# Altium PCB PCB1.PcbDoc
Units mm, origin at the board's own origin, x right, y up, seen from the top; angles counter-clockwise.
Board outline 45 x 30.8 mm, 2 copper layers (Top Layer, Bottom Layer), stack 1.57 mm thick; 27 components, 22 nets, 147 pads, 2 vias.
Unrouted connection lines stored in the file: 2.
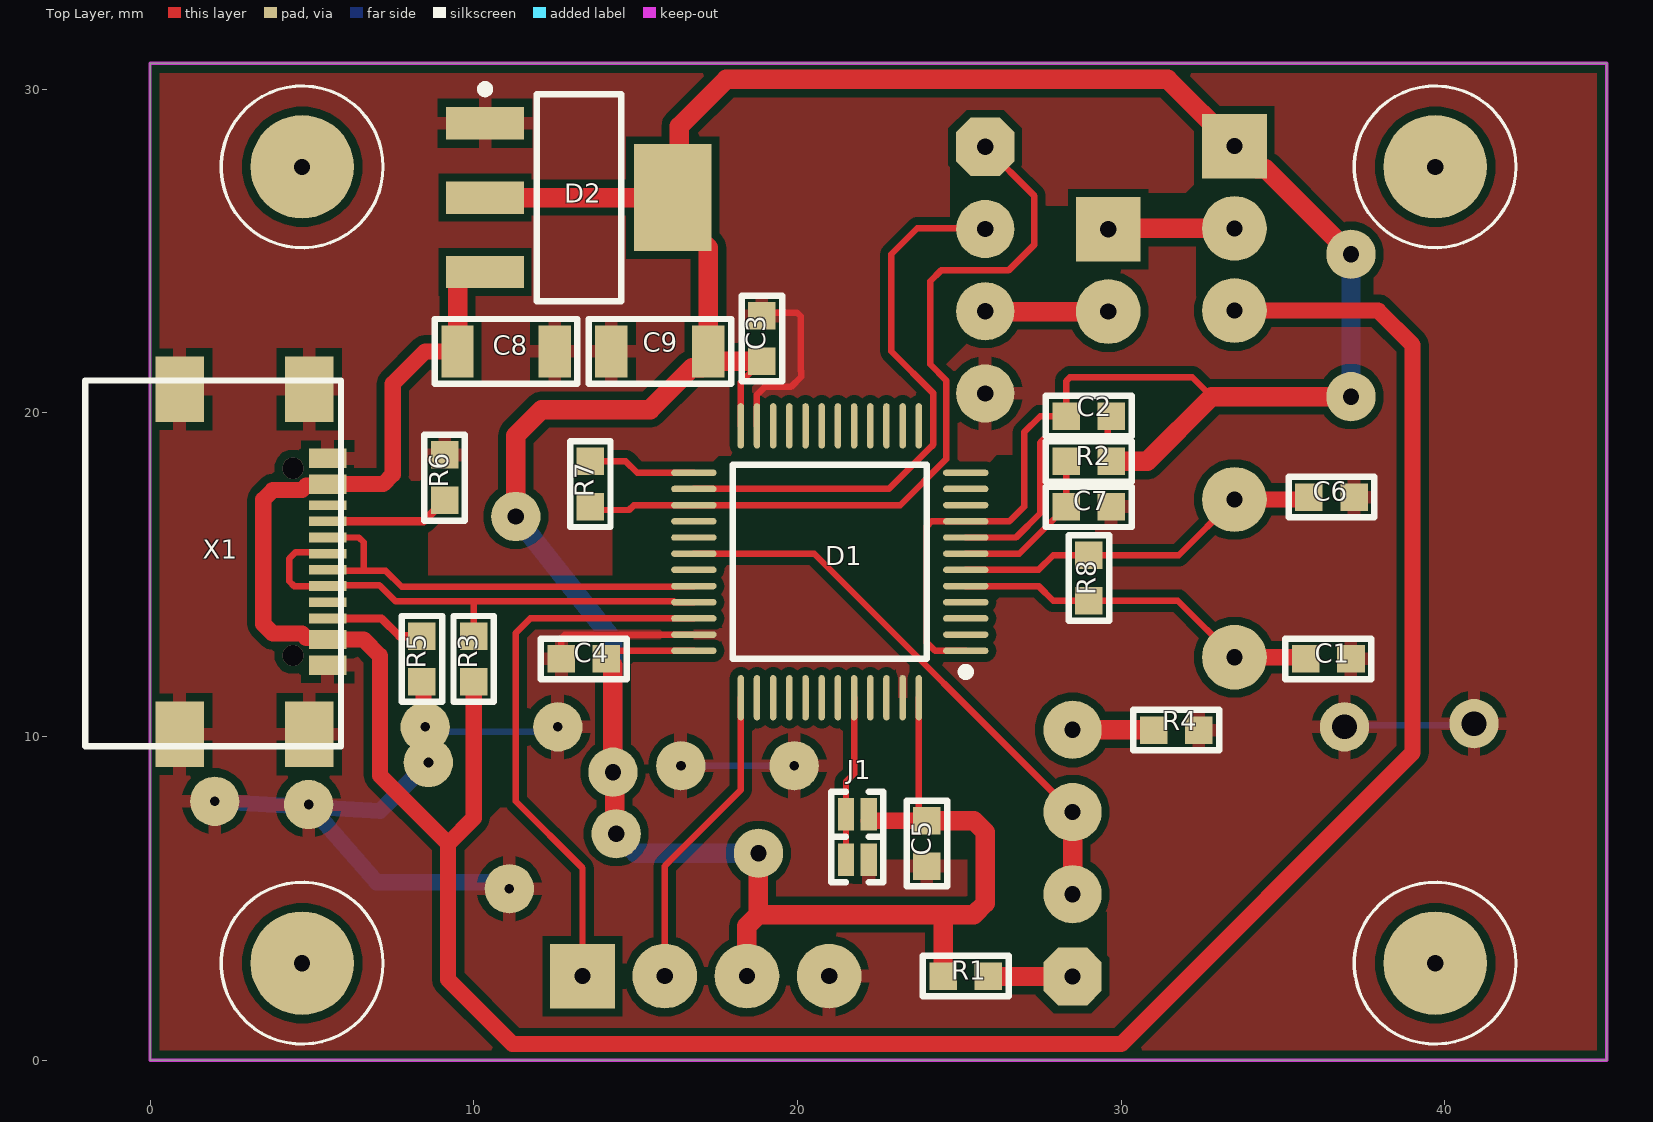
[diagram p0: Top Layer view]
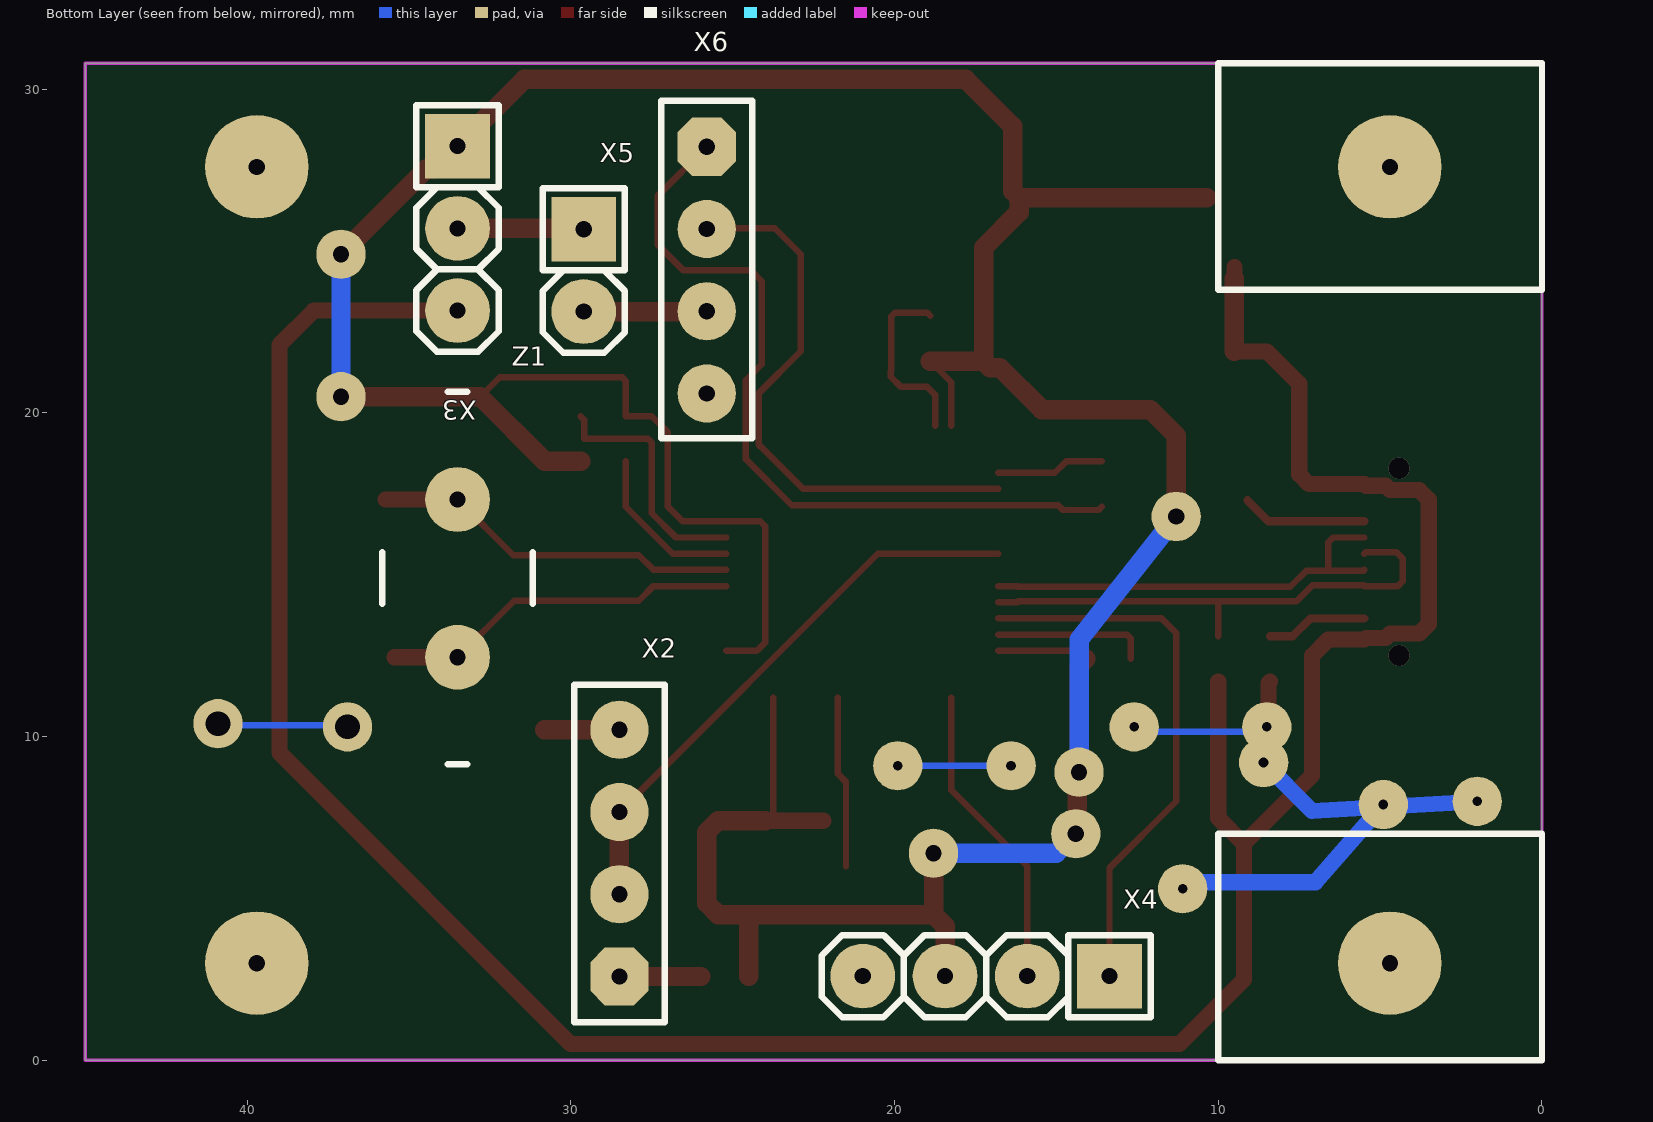
[diagram p1: Bottom Layer view, seen from below]
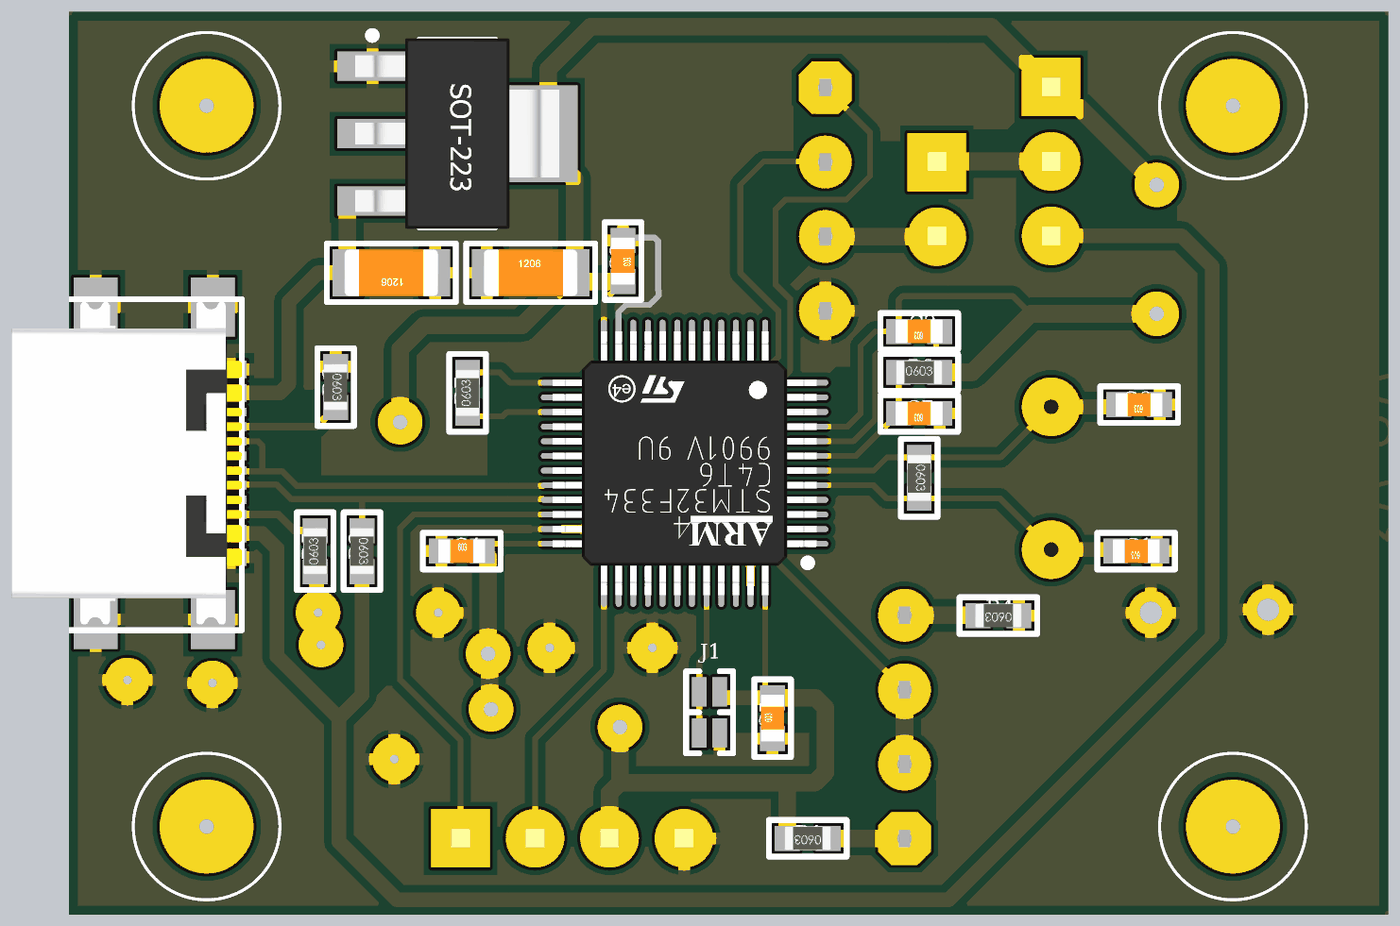
[diagram p2: 3D render of the assembled board from above, using the file's embedded part models]
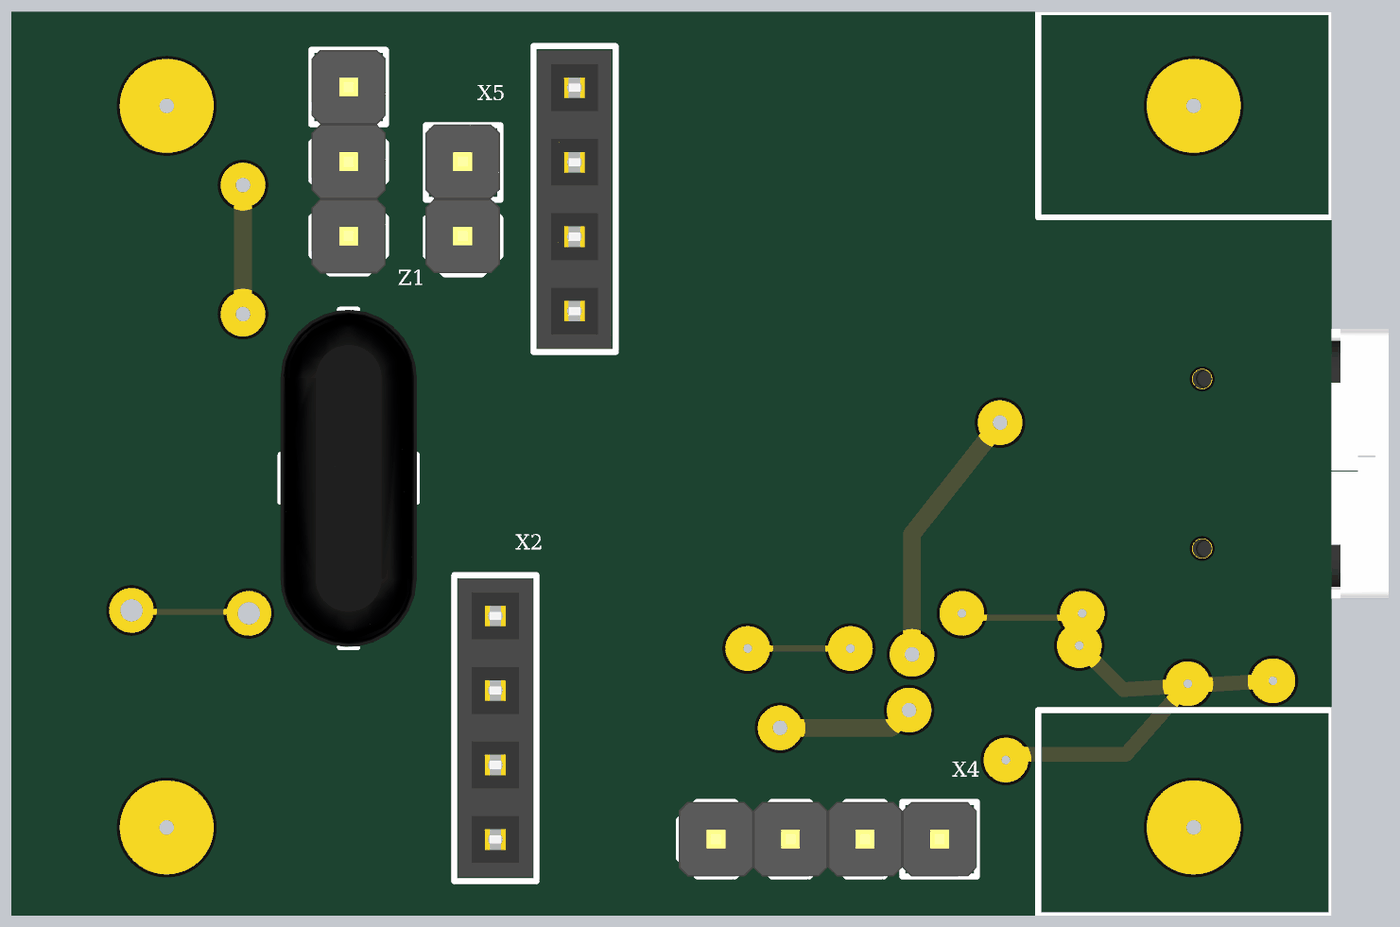
[diagram p3: 3D render of the assembled board from below, using the file's embedded part models]

## Layer stack, top to bottom
Top Solder: solder mask 0.0102, Solder Resist, Dk 3.5
Top Layer: signal copper 0.0356
Dielectric 1: core 1.4986, Core-043, Dk 4.3
Bottom Layer: signal copper 0.0356
Bottom Solder: solder mask 0.0102, Solder Resist, Dk 3.5

## Board outline
0,0 45,0 45,30.8 0,30.8

## Design rules (kind name [scope] priority, off if disabled: settings)
Clearance [All] p1: gap=0.1 ignorepadtopadclearanceinfootprint=FALSE except(0.25: Arc-Poly Track-Poly SMDPad-Poly THPad-Poly Via-Poly Fill-Poly Poly-Poly)
DiffPairsRouting [All] p1: maxlimit=0.25 minlimit=0.25 mostfreqgap=0.25 toplayer_minwidth=0.2 toplayer_maxwidth=0.2 toplayer_prefwidth=0.2 bottomlayer_minwidth=0.2 bottomlayer_maxwidth=0.2 bottomlayer_prefwidth=0.2 maxuncoupledlength=12.7
PolygonConnect [All] p1: connectstyle=Relief reliefconductorwidth=0.4 reliefentries=4 polygonreliefangle="90 Angle" airgapwidth=0.254
RoutingVias [All] p1: holewidth=0.711 width=1.27 viastyle="Through Hole" minholewidth=0.711 minwidth=1.27 maxholewidth=0.711 maxwidth=1.27
SolderMaskExpansion [All] p1: expansion=0.102 istentingtop=FALSE
SupplyNets "Schematic Supply Nets_2" [InNet('GND')] p1: voltage=0.000
SupplyNets "Schematic Supply Nets_1" [InNet('+3.3')] p2: voltage=0.000
SupplyNets "Schematic Supply Nets" [InNet('+5')] p3: voltage=0.000
Width [All] p1: maxlimit=10 minlimit=0.1 preferedwidth=0.254
29 further rules are at their usual default settings.

## Classes and differential pairs
differential pair USB: +USB_P -USB_N
differential pair CLOCK: +CLOCK_P -CLOCK_N

## Components (designator, comment, footprint, x,y, rotation, side; value= is the part's Value field where it differs from the comment)
C1 "Ceramic capacitor, 18pF, X7R, ±10%, 16V, 0603, -55...+125°C" "CAP: 0603" 36.4,12.4 r180 top value=18pF
C2 "Ceramic capacitor, 0.1μF, X7R, ±10%, 16V, 0603, -55...+125°C" "CAP: 0603" 29,19.9 r180 top value=0.1μF
C3 "Ceramic capacitor, 0.1μF, X7R, ±10%, 16V, 0603, -55...+125°C" "CAP: 0603" 18.9,22.3 r270 top value=0.1μF
C4 "Ceramic capacitor, 0.1μF, X7R, ±10%, 16V, 0603, -55...+125°C" "CAP: 0603" 13.4,12.4 r0 top value=0.1μF
C5 "Ceramic capacitor, 0.1μF, X7R, ±10%, 16V, 0603, -55...+125°C" "CAP: 0603" 24,6.7 r90 top value=0.1μF
C6 "Ceramic capacitor, 18pF, X7R, ±10%, 16V, 0603, -55...+125°C" "CAP: 0603" 36.5,17.4 r180 top value=18pF
C7 "Ceramic capacitor, 0.1μF, X7R, ±10%, 16V, 0603, -55...+125°C" "CAP: 0603" 29,17.1 r180 top value=0.1μF
C8 "Ceramic capacitor, 10μF, X7R, ±10%, 50V, 1206, -55...+125°C" "CAP: 1206" 11,21.9 r180 top value=10μF
C9 "Ceramic capacitor, 10μF, X7R, ±10%, 50V, 1206, -55...+125°C" "CAP: 1206" 15.75,21.9 r0 top value=10μF
D1 "IC microcontroller, 32-Bit, Cortex-M3, 72MHz, 64KB, 20KB, 2...3.6V, -40...+85°C, 48-LQFP" 48-LQFP 21,15.4 r180 top
D2 "Linear voltage regulator, input 3.9...18V, 0.6V, output 3.3V, 1.2A, -40...+85°C, SOT223" SOT223 13.25,26.65 r0 top
J1 "" "CON: JUMPER x2" 21.85,6.2 r0 top
R1 "Resistor film, 100R, ±5%, 0603, 0.1W, -55...+125°C" "RES: 0603" 25.2,2.6 r180 top value=100R
R2 "Resistor film, 10K, ±5%, 0603, 0.1W, -55...+125°C" "RES: 0603" 29,18.5 r0 top value=10K
R3 "Resistor film, 5.1K, ±5%, 0603, 0.1W, -55...+125°C" "RES: 0603" 10,12.4 r270 top value=5.1K
R4 "Resistor film, 100R, ±5%, 0603, 0.1W, -55...+125°C" "RES: 0603" 31.7,10.2 r180 top value=100R
R5 "Resistor film, 5.1K, ±5%, 0603, 0.1W, -55...+125°C" "RES: 0603" 8.4,12.4 r90 top value=5.1K
R6 "Resistor film, 5.1K, ±5%, 0603, 0.1W, -55...+125°C" "RES: 0603" 9.1,18 r270 top value=5.1K
R7 "Resistor film, 100R, ±5%, 0603, 0.1W, -55...+125°C" "RES: 0603" 13.6,17.8 r90 top value=100R
R8 "Resistor film, 100R, ±5%, 0603, 0.1W, -55...+125°C" "RES: 0603" 29,14.9 r270 top value=100R
X1 "" "USB type-C" 3.2,15.4 r270 top
X2 "Connector, 4pin, 2.54mm, 500VAC, 3A" "CON: PBS-4" 28.5,6.4 r90 bottom
X3 "Connector, 3pin, 2.54mm, 500VAC, 3A" "CON: PLS-3" 33.5,25.7 r270 bottom
X4 "Connector, 4pin, 2.54mm, 500VAC, 3A" "CON: PLS-4" 17.17,2.6 r0 bottom
X5 "Connector, 2pin, 2.54mm, 500VAC, 3A" "CON: PLS-2" 29.6,24.4 r270 bottom
X6 "Connector, 4pin, 2.54mm, 500VAC, 3A" "CON: PBS-4" 25.8,24.41 r270 bottom
Z1 "Crystal, 8MHz, 12.5pF, ±20ppm, case 3215, -40...+85°C" "OSC: HC-49S" 33.5,14.9 r270 bottom

## Footprints (in the part's own frame and the unit in brackets; to place one, negate y for a bottom-side part, rotate by r counter-clockwise, add the part's x,y. Pads: shape width x height; smd on the part's side, far side on the other; paste and mask are expansions set on the pad)
48-LQFP [mm] "QFP, 48-Leads, Body 7x7mm, Pitch 0.5mm, IPC Medium Density"
  oval 1.4x0.2 smd: 1(-4.2,2.75) 2(-4.2,2.25) 3(-4.2,1.75) 4(-4.2,1.25) 5(-4.2,0.75) 6(-4.2,0.25) 7(-4.2,-0.25) 8(-4.2,-0.75) 9(-4.2,-1.25) 10(-4.2,-1.75) 11(-4.2,-2.25) 12(-4.2,-2.75) 25(4.2,-2.75) 26(4.2,-2.25) 27(4.2,-1.75) 28(4.2,-1.25) 29(4.2,-0.75) 30(4.2,-0.25) 31(4.2,0.25) 32(4.2,0.75) 33(4.2,1.25) 34(4.2,1.75) 35(4.2,2.25) 36(4.2,2.75)
  oval 0.2x1.4 smd: 13(-2.75,-4.2) 14(-2.25,-4.2) 15(-1.75,-4.2) 16(-1.25,-4.2) 17(-0.75,-4.2) 18(-0.25,-4.2) 19(0.25,-4.2) 20(0.75,-4.2) 21(1.25,-4.2) 22(1.75,-4.2) 23(2.25,-4.2) 24(2.75,-4.2) 37(2.75,4.2) 38(2.25,4.2) 39(1.75,4.2) 40(1.25,4.2) 41(0.75,4.2) 42(0.25,4.2) 43(-0.25,4.2) 44(-0.75,4.2) 45(-1.25,4.2) 46(-1.75,4.2) 47(-2.25,4.2) 48(-2.75,4.2)
  round 0.5 on Mech1: ""(-4,4)
  silkscreen extent -4.33,-3 3,3.52, body extent -4.5,-4.5 4.5,4.5, height 1.6
"CAP: 0603" [mm]
  rect 0.85x0.85 smd: 1(-0.7,0) 2(0.7,0)
  silkscreen extent -1.33,-0.63 1.33,0.63, body extent -0.8,-0.4 0.8,0.4, height 0.3
"CAP: 1206" [mm]
  rect 1x1.6 smd: 1(-1.5,0) 2(1.5,0)
  silkscreen extent -2.2,-1 2.2,1, body extent -1.6,-0.8 1.6,0.8, height 1
"CON: JUMPER x2" [mm]
  rect 0.5x1 smd: 1(-0.35,1.4) 2(0.35,1.4) 3(-0.35,0) 4(0.35,0)
  silkscreen extent -0.8,-0.7 0.8,2.1
"CON: PBS-4" [mm] "PBS-5"
  oct 1.8x1.8 hole 0.5: 1(-3.81,0)
  round 1.8 hole 0.5: 2(-1.27,0) 3(1.27,0) 4(3.81,0)
  silkscreen extent -5.23,-1.4 5.2,1.4, body extent -5.08,-1.27 5.08,1.27, height 8.4
"CON: PLS-2" [mm]
  rect 2x2 hole 0.5: 1(-1.27,0)
  round 2 hole 0.5: 2(1.27,0)
  silkscreen extent -2.54,-1.27 2.54,1.27, body extent -2.57,-1.28 2.51,1.26, height 8.54
"CON: PLS-3" [mm]
  rect 2x2 hole 0.5: 1(-2.54,0)
  round 2 hole 0.5: 2(0,0) 3(2.54,0)
  silkscreen extent -3.81,-1.27 3.81,1.27, body extent -3.81,-1.27 3.81,1.27, height 8.54
"CON: PLS-4" [mm] "PLS-40 4 pin header"
  rect 2x2 hole 0.5: 1(-3.81,0)
  round 2 hole 0.5: 2(-1.27,0) 3(1.27,0) 4(3.81,0)
  silkscreen extent -5.08,-1.27 5.08,1.27, body extent -5.08,-1.27 5.08,1.27, height 8.54
"OSC: HC-49S" [mm]
  round 2 hole 0.5: 1(-2.425,0) 2(2.45,0)
  silkscreen extent -5.75,-2.32 5.75,2.32, body extent -5.75,-2.32 5.75,2.33, height 3.5
"RES: 0603" [mm]
  rect 0.85x0.85 smd: 1(-0.7,0) 2(0.7,0)
  silkscreen extent -1.33,-0.63 1.33,0.63, body extent -0.8,-0.4 0.8,0.4, height 0.44
SOT223 [mm] "SOT223, 4-Leads, Body 6,50x7,00mm (avg), Pitch 2,30mm, IPC Medium Density"
  rect 2.4x1 smd: 1(-2.9,2.3) 2(-2.9,0) 3(-2.9,-2.3)
  rect 2.4x3.3 smd: 4(2.9,0)
  round 0.5 on Mech1: ""(-3,2.7)
  silkscreen extent -3.02,-3.2 1.3,3.47, body extent -3.48,-3.25 3.48,3.25, height 1.65
"USB type-C" [mm] "USB type-C"
  rect 2.02x1.5 smd: 0(-5.33,1.713) 0(-5.33,-2.287) 0(5.33,1.713) 0(5.33,-2.287)
  rect 0.6x1.15 smd: 1(-3.2,2.288) 2(-2.4,2.288) 11(2.4,2.288) 12(3.2,2.288)
  rect 0.3x1.15 smd: 3(-1.75,2.288) 4(-1.25,2.288) 5(-0.75,2.288) 6(-0.25,2.288) 7(0.25,2.288) 8(0.75,2.288) 9(1.25,2.288) 10(1.75,2.288)
  silkscreen extent -5.6,-5.2 5.7,2.7, body extent -5.5,-5.15 5.5,2.7, height 3.2

## Part data
C1 C2 C3 C4 C5 C6 C7: library part Ceramic_0603, Manufacturer=Yageo, Package=0603, PartNumber=CC0603KRX7R7BB104, Temperature=-55...+125°C, Tolerance=±10%, TypeCapacitor="Ceramic capacitor", TypeDielectric=X7R, Voltage=16V, HelpURL=https://www.digikey.com/product-detail/en/yageo/CC0603KRX7R7BB104/311-1088-1-ND/302998
  C1 C6: ValueManufacturerPartNumber="Ceramic capacitor, 18pF, X7R, ±10%, 16V, 0603, -55...+125°C"
  C2 C3 C4 C5 C7: ValueManufacturerPartNumber="Ceramic capacitor, 0.1μF, X7R, ±10%, 16V, 0603, -55...+125°C"
C8 C9: library part Ceramic_1206, Manufacturer=Yageo, Package=1206, PartNumber=CC1206KRX7R9BB104, Temperature=-55...+125°C, Tolerance=±10%, TypeCapacitor="Ceramic capacitor", TypeDielectric=X7R, Voltage=50V, HelpURL=https://www.digikey.com/product-detail/en/yageo/CC1206KRX7R9BB104/311-1179-1-ND/303089, ValueManufacturerPartNumber="Ceramic capacitor, 10μF, X7R, ±10%, 50V, 1206, -55...+125°C"
D1: library part STM32F103C8T6, "Cortex-M3", Manufacturer=STMicroelectronics, Package=48-LQFP, Temperature=-40...+85°C, ComponentType="IC microcontroller", CoreProcessor=Cortex-M3, CoreSize=32-Bit, HelpURL=https://www.digikey.com/product-detail/en/stmicroelectronics/STM32F103C8T6TR/497-17666-1-ND/7804402, MemoryRAM=20KB, MemoryROM=64KB, PartNumber=STM32F103C8T6, Speed=72MHz, Supply=2...3.6V, ValueManufacturerPartNumber="IC microcontroller, 32-Bit, Cortex-M3, 72MHz, 64KB, 20KB, 2...3.6V, -40...+85°C, 48-LQFP"
D2: library part LDL1117S33R, "Linear voltage regulator", CurrentOutput=1.2A, Manufacturer=STMicroelectronics, Package=SOT223, Temperature=-40...+85°C, VoltageInput="input 3.9...18V", VoltageOutput="output 3.3V", ComponentType="Linear voltage regulator", HelpURL=https://www.digikey.com/product-detail/en/stmicroelectronics/LDL1117S33R/497-17239-1-ND/7102079, MaxDropout=0.6V, PartNumber=LDL1117S33R, ValueManufacturerPartNumber="Linear voltage regulator, input 3.9...18V, 0.6V, output 3.3V, 1.2A, -40...+85°C, SOT223"
J1: library part Jumper_double, CommentText="\"Перемычка\""
R1 R2 R3 R4 R5 R6 R7 R8: library part Resistor_0603, Manufacturer=Yageo, Package=0603, PartNumber=RC0603JR-07100RL, Power=0.1W, Temperature=-55...+125°C, Tolerance=±5%, TypeResistor="Resistor film", HelpURL=https://www.digikey.com/product-detail/en/yageo/RC0603JR-07100RL/311-100GRCT-ND/729644
  R1 R4 R7 R8: ValueManufacturerPartNumber="Resistor film, 100R, ±5%, 0603, 0.1W, -55...+125°C"
  R2: ValueManufacturerPartNumber="Resistor film, 10K, ±5%, 0603, 0.1W, -55...+125°C"
  R3 R5 R6: ValueManufacturerPartNumber="Resistor film, 5.1K, ±5%, 0603, 0.1W, -55...+125°C"
X1: library part L-KLS1-5473, "Разъем L-KLS1-5473 / гнездо USB C 3.1 на плату (C8)", Manufacturer=KLS, CommentText=L-KLS1-5473, HelpURL=https://belchip.by/product/?selected_product=15991, PartNumber=L-KLS1-5473
X2 X6: library part PBS-4, CurrentMax=3A, Manufacturer=Connfly, VoltageMax=500VAC, CommentText="\"Разъем\"", HelpURL=https://www.chipdip.ru/product/pbs-4, Multichannel=4pin, PartNumber=PBS-4, Pitch=2.54mm, TypeConnector=Connector, ValueManufacturerPartNumber="Connector, 4pin, 2.54mm, 500VAC, 3A"
X3: library part PLS-3, CurrentMax=3A, Manufacturer=Connfly, VoltageMax=500VAC, CommentText="\"Разъем\"", HelpURL=https://www.chipdip.ru/product/pls-3, Multichannel=3pin, PartNumber=PLS-3, Pitch=2.54mm, TypeConnector=Connector, ValueManufacturerPartNumber="Connector, 3pin, 2.54mm, 500VAC, 3A"
X4: library part PLS-4, CurrentMax=3A, Manufacturer=Connfly, VoltageMax=500VAC, CommentText="\"Разъем\"", HelpURL=https://www.chipdip.ru/product/pls-4, Multichannel=4pin, PartNumber=PLS-4, Pitch=2.54mm, TypeConnector=Connector, ValueManufacturerPartNumber="Connector, 4pin, 2.54mm, 500VAC, 3A"
X5: library part PLS-2, CurrentMax=3A, Manufacturer=Connfly, VoltageMax=500VAC, CommentText="\"Разъем\"", HelpURL=https://www.chipdip.ru/product/pls-2, Multichannel=2pin, PartNumber=PLS-2, Pitch=2.54mm, TypeConnector=Connector, ValueManufacturerPartNumber="Connector, 2pin, 2.54mm, 500VAC, 3A"
Z1: library part Crystal_HC-49, Frequency=8MHz, LoadCapacitance=12.5pF, Manufacturer=Epson, Package="case 3215", PartNumber="FC-135 32.7680KA-A5", Temperature=-40...+85°C, Tolerance=±20ppm, HelpURL=https://www.digikey.com/product-detail/en/epson/FC-135-32.7680KA-A5/SER4103CT-ND/6188447, TypeOscilator=Crystal, ValueManufacturerPartNumber="Crystal, 8MHz, 12.5pF, ±20ppm, case 3215, -40...+85°C"

## Free pads (board coordinates)
  round 3.2 hole 0.5: 0(4.7,3) 0(4.7,27.6) 0(39.7,3) 0(39.7,27.6)
  round 1.524 hole 0.5: 2(11.3,16.8) 3(14.3,8.9) 4(37.1,20.5) 5(37.1,24.9) 6(18.796,6.396) 7(14.4,7)
  round 1.524 hole 0.3: 8(11.1,5.3) 9(2,8) 9(4.9,7.9) 9(8.5,10.3) 9(8.6,9.2) 9(12.6,10.3) 9(16.4,9.1) 9(19.9,9.1)
  round 1.524 hole 0.762: 10(36.9,10.3) 11(40.9,10.4)

## Via types
v1: diameter 0.65, hole 0.65, Top Layer to Bottom Layer, 2 vias

## Nets (pads, with @x,y where several pads share a name; then routed paths per layer and width w, separated by ;. In a path a pad name is that pad's centre, name@x,y a point inside that pad or via, vN(x,y) a via of type N, cw(c..) or ccw(c..) an arc to the next point about the centre after c; other vN are vias at no path point)
+3.3: C2.2 C3.2 C4.2 C5.2 C9.2 D1.1 D1.9 D1.24 D1.36 D1.48 D2.2 D2.4 J1.2 pad.2 pad.3 pad.4 pad.5 pad.6 pad.7 R1.2 R2.2 X3.1 X4.3 | length 125.5
  Top Layer w0.2: C4.2 14.35,12.65 D1.36 ; D1.24 18.25,20.95 C3.2 ; D1.48 23.75,7.65 C5.2 ; D1.1 24.25,12.65 24,12.9 24,16.5 24.15,16.65 D1.9 26.55,16.65 27,17.1 27,19.4 27.5,19.9 C2.2 28.3,20.983 28.417,21.1 32.2,21.1 32.8,20.5
  Top Layer w0.5: J1.2@22.2,7.4 C5.2
  Top Layer w0.6: D2.2 D2.4 ; pad.2 11.3,19.3 12.1,20.1 15.45,20.1 16.75,21.4 17.05,21.4 17.25,21.6 C9.2 17.25,25.1 16.15,26.2 D2.4 ; C4.2 14.3,12.2 pad.3 14.35,8.85 14.35,7.05 pad.7 ; C9.2@17.45,21.6 C3.2 ; X4.3 18.44,4.149 18.791,4.5 ; pad.6@18.8,6.4 pad.6 18.791,6.391 18.791,4.5 ; C5.2 25.449,7.4 25.8,7.049 25.8,4.851 25.449,4.5 24.5,4.5 ; R1.2 24.5,4.5 ; R2.2 30.8,18.5 32.8,20.5 pad.4 ; pad.5 34.46,27.54 34.2,27.54 X3.1 31.44,30.3 17.8,30.3 16.349,28.849 16.349,26.849 D2.4 ; 18.791,4.5 24.5,4.5
  Bottom Layer w0.6: pad.2 14.3,13 pad.3 ; pad.7 15.004,6.396 pad.6 ; pad.4 pad.5
+5: C8.2 D2.3 R3.2 X1.2 X1.11 X3.3 | length 89.1
  Top Layer w0.5: C8.2 8.5,21.9 7.5,20.9 7.5,18.1 7.2,17.8 X1.2 5.438,17.75 4.827,17.75 4.692,17.615 3.793,17.615 3.5,17.322 3.5,13.478 3.793,13.185 4.692,13.185 4.827,13.05 5.438,13.05 X1.11 6.6,13 7.1,12.5 7.1,8.8 9.207,6.693 ; D2.3@9.5,24.15 D2.3@9.5,24.5 ; R3.2 10,7.486 9.207,6.693 ; X3.3 37.94,23.16 39,22.1 39,9.5 30,0.5 11.2,0.5 9.207,2.493 9.207,6.693
  Top Layer w0.6: C8.2 D2.3@9.5,24.15
CLOCK_N: C6.2 D1.6 R8.1 Z1.1 | length 11.5
  Top Layer w0.2: D1.6 27.45,15.15 27.9,15.6 R8.1 31.775,15.6 Z1.1 ; C6.2@35.725,17.325 C6.2
  Top Layer w0.5: Z1.1 C6.2@35.725,17.325
CLOCK_P: C1.2 D1.5 R8.2 Z1.2 | length 11.2
  Top Layer w0.2: D1.5 27.45,14.65 27.9,14.2 R8.2 31.75,14.2 Z1.2 ; C1.2@35.45,12.45 C1.2@35.5,12.4
  Top Layer w0.5: Z1.2 C1.2@35.45,12.45
GND: C1.1 C2.1 C3.1 C4.1 C5.1 C6.1 C7.1 C8.1 C9.1 D1.8 D1.23 D1.35 D1.47 D2.1 J1.4 pad.8 pad.9 pad.10 pad.11 R4.1 R5.1 R6.1 X1.0 X1.1 X1.12 X4.4 X6.4 | length 46.5
  Top Layer w0.2: C4.1 12.7,13.033 12.817,13.15 D1.35 ; D1.23 18.75,20.561 18.989,20.8 19.8,20.8 20.117,21.117 20.117,21.283 20.1,21.3 20.1,22.983 19.983,23.1 19,23.1 C3.1 ; D1.8 26.75,16.15 27.5,16.9 27.5,19.083 27.617,19.2 29.583,19.2 29.583,19.783 C2.1
  Top Layer w0.5: R5.1 8.45,11.65 8.45,10.05 pad.9@8.5,10.3
  Bottom Layer w0.2: pad.9@8.5,10.3 8.65,10.15 12.45,10.15 pad.9@12.6,10.3 ; pad.9@16.4,9.1 pad.9@19.9,9.1 ; pad.10 36.95,10.35 40.85,10.35 pad.11
  Bottom Layer w0.5: pad.9@2,8 7.1,7.7 pad.9@8.6,9.2 ; pad.9@4.9,7.9 7,5.5 10.9,5.5 pad.8
NetC7_2: C7.2 D1.7 R2.1 | length 5.1
  Top Layer w0.2: D1.7 26.85,15.65 C7.2 R2.1
NetD1_18: D1.18
NetD1_25: D1.25 R7.2 | length 3.3
  Top Layer w0.2: R7.2 14.7,18.5 15.05,18.15 D1.25
NetD1_26: D1.26 X6.2 | length 17.4
  Top Layer w0.2: D1.26 22.824,17.65 24.05,18.876 24.2,19.026 24.2,20.6 22.9,21.9 22.9,24.9 23.7,25.7 X6.2@25.564,25.7
NetD1_27: D1.27 R7.1 X6.1 | length 24.7
  Top Layer w0.2: R7.1 13.7,17 14.8,17 14.95,17.15 D1.27 23.176,17.15 24.6,18.574 24.6,21 24.1,21.5 24.1,24.063 24.437,24.4 26.52,24.4 27.32,25.2 27.32,26.7 X6.1
NetD1_30: D1.30 X2.2 X2.3 | length 17.5
  Top Layer w0.2: D1.30 20.52,15.65 X2.3
  Top Layer w0.6: X2.2 X2.3
NetD1_34: D1.34 X4.1 | length 17.1
  Top Layer w0.2: X4.1 13.36,5.94 11.3,8 11.3,13.2 11.75,13.65 D1.34
NetD1_37: D1.37 X4.2 | length 9.6
  Top Layer w0.2: X4.2 15.9,6 18.25,8.35 D1.37
NetD1_44: D1.44 J1.1 J1.3 | length 5.3
  Top Layer w0.2: J1.3@21.5,6 21.5,7.4 21.5,8.6 21.75,8.85 D1.44
NetR1_1: R1.1 X2.1 | length 2.6
  Top Layer w0.2: R1.1@25.9,2.5 R1.1@25.99,2.59
  Top Layer w0.6: R1.1@25.99,2.59 X2.1
NetR4_2: R4.2 X2.4 | length 2.6
  Top Layer w0.2: R4.2@30.81,10.01 R4.2
  Top Layer w0.6: X2.4 R4.2@30.81,10.21
NetR5_2: R5.2 X1.10 | length 3.1
  Top Layer w0.254: X1.10 7.15,13.65 7.7,13.1 R5.2
NetR6_2: R6.2 X1.4 | length 3.9
  Top Layer w0.254: X1.4 8.45,16.65 R6.2
NetX3_2: X3.2 X5.1 | length 3.9
  Top Layer w0.6: X5.1 29.63,25.7 X3.2
NetX5_2: X5.2 X6.3 | length 4
  Top Layer w0.6: X6.3@25.632,23.13 X5.2
USB_N: D1.32 X1.5 X1.7 | length 13.6
  Top Layer w0.2: X1.7 5.513,15.125 6.6,15.125 ; X1.5 6.45,16.15 6.6,16 6.6,15.125 ; D1.32 16.2,14.65 16.175,14.625 7.775,14.625 7.275,15.125 6.6,15.125
USB_P: D1.33 R3.1 X1.6 X1.8 | length 15.9
  Top Layer w0.2: X1.6 5.438,15.7 4.5,15.7 4.3,15.5 4.3,14.8 4.45,14.65 X1.8 5.513,14.675 7.089,14.675 7.589,14.175 10,14.175 ; R3.1 10,14.175 ; D1.33 16.2,14.15 16.175,14.175 10,14.175
pads on no net: D1. D1.2 D1.3 D1.4 D1.10 D1.11 D1.12 D1.13 D1.14 D1.15 D1.16 D1.17 D1.19 D1.20 D1.21 D1.22 D1.28 D1.29 D1.31 D1.38 D1.39 D1.40 D1.41 D1.42 D1.43 D1.45 D1.46 D2. X1.3 X1.9
copper on no net:
  other v1: 4.413,12.51 4.413,18.29

## Polygon pours and split planes (outlines as drawn)
GND on Top Layer "GND_L01_P001" (solid, remove dead copper, pour order 1): 45,30.8 0,30.8 0,0 45,0 45,2.1

## Keep-outs
Keep-Out Layer:
  the board outline again, w0.1

## Other copper
Top Layer:
  pour cut-out: 29.65,3.165 29.572,3.243 29.572,4.575 29.075,4.079 29.075,3.74
  pour cut-out: 24.675,6.839 25.216,6.839 25.3,6.755 25.3,6.2 24.679,6.2
  pour cut-out: 22.7,6.89 23.254,6.89 23.325,6.819 23.321,6.815 23.321,6.2 22.704,6.2
  pour cut-out: 22.676,18.007 23.217,18.548 23.184,18.581 23.184,18.656 23.09,18.656 23,18.746 22.924,18.67 17.563,18.67 17.4,18.507
  pour cut-out: 14.275,16.643 14.275,14.925 14.3,14.9 16.1,14.9 16.1,16.8 16,16.9 15.9,16.8 14.7,16.8
  pour cut-out: 6.91,16.166 6.964,16.219 6.964,16.266 8.568,16.266 8.597,16.295 8.6,16.292 8.6,14.9 8.005,14.9 7.45,15.455 6.984,15.455 6.957,15.482
  pour cut-out: 6.313,17.29 6.313,17.034 8.291,17.034 8.425,17.169 8.425,17.923 8.407,17.905 7.971,17.905 7.971,17.85 7.56,17.44
  pour cut-out: 25.9,16.9 26.295,16.9 26.7,17.305 26.7,18.7 26.157,18.7 25.937,18.48
  pour cut-out: 24.35,21.25 25.3,22.2 25.3,24.4 25.1,24.6 24.9,24.4 24,24.4
  pour cut-out: 27.5,25.5 28.7,25.5 28.8,25.6 28.8,26.4 27.7,26.4 27.5,26.2
  pour cut-out: 32.6,23.3 32.3,23.6 32.3,25.6 34,25.6 33.8,25.4 33.8,23.5
  pour cut-out: 32.7,27.5 32,26.8 30.4,26.8 30.4,26.2 31.1,25.5 31.4,25.8 33.7,25.8 33.7,27.4 33.6,27.5
  pour cut-out: 37,24.5 37,23.6 36.8,23.4 36.9,23.3 37.8,23.3 37.8,24.3 37.5,24.6
  pour cut-out: 24.8,27.9 24.71,27.81 24.71,26.057 27.057,26.057 27.4,26.4 26.3,27.5 26.3,27.7
  pour cut-out: 27.6,15.8 29.2,15.8 29.2,16.4 29.3,16.5 27.9,16.5
  pour cut-out: 11.1,14.2 11.075,14.175 10,14.175 10,7.996 10.51,7.486 10.824,7.8 11.4,7.8 11.4,13.1 11.3,13.2 11.775,13.675
  pour cut-out: 21.15,6.8 21.296,6.8 21.296,6.6 21.15,6.6
  pour cut-out: 16.5,14.15 16.45,14.1 11.6,14.1 11.6,13.8 11.75,13.65 11.8,13.7 16.4,13.7

## Silkscreen, mask and mechanical layers (free items; w line width, h text height)
Top Overlay:
  circle w0.1: c39.7,27.6 r2.5
  circle w0.1: c39.7,3 r2.5
  circle w0.1: c4.7,3 r2.5
  circle w0.1: c4.7,27.6 r2.5
Bottom Overlay:
  lines w0.2: 0,0 0,7 10,7 10,0 0,0 ; 0,23.8 0,30.8 10,30.8 10,23.8 0,23.8

## Dimensions
45,30.8 to 45,0 on Top Layer
0,30.8 to 45,30.8 on Top Layer